# Altium PCB LimeSDR-Micro_mPCIe_1v4.PcbDoc (part 7 of 11)
Units mm, origin at the board's own origin, x right, y up, seen from the top; angles counter-clockwise.
Board outline 50.8 x 29.7 mm, 8 copper layers (Top, L2, L3, L4, L5, L6, L7, Bottom), stack 0.925 mm thick; 664 components, 386 nets, 2358 pads, 843 vias.
Unrouted connection lines stored in the file: 28.
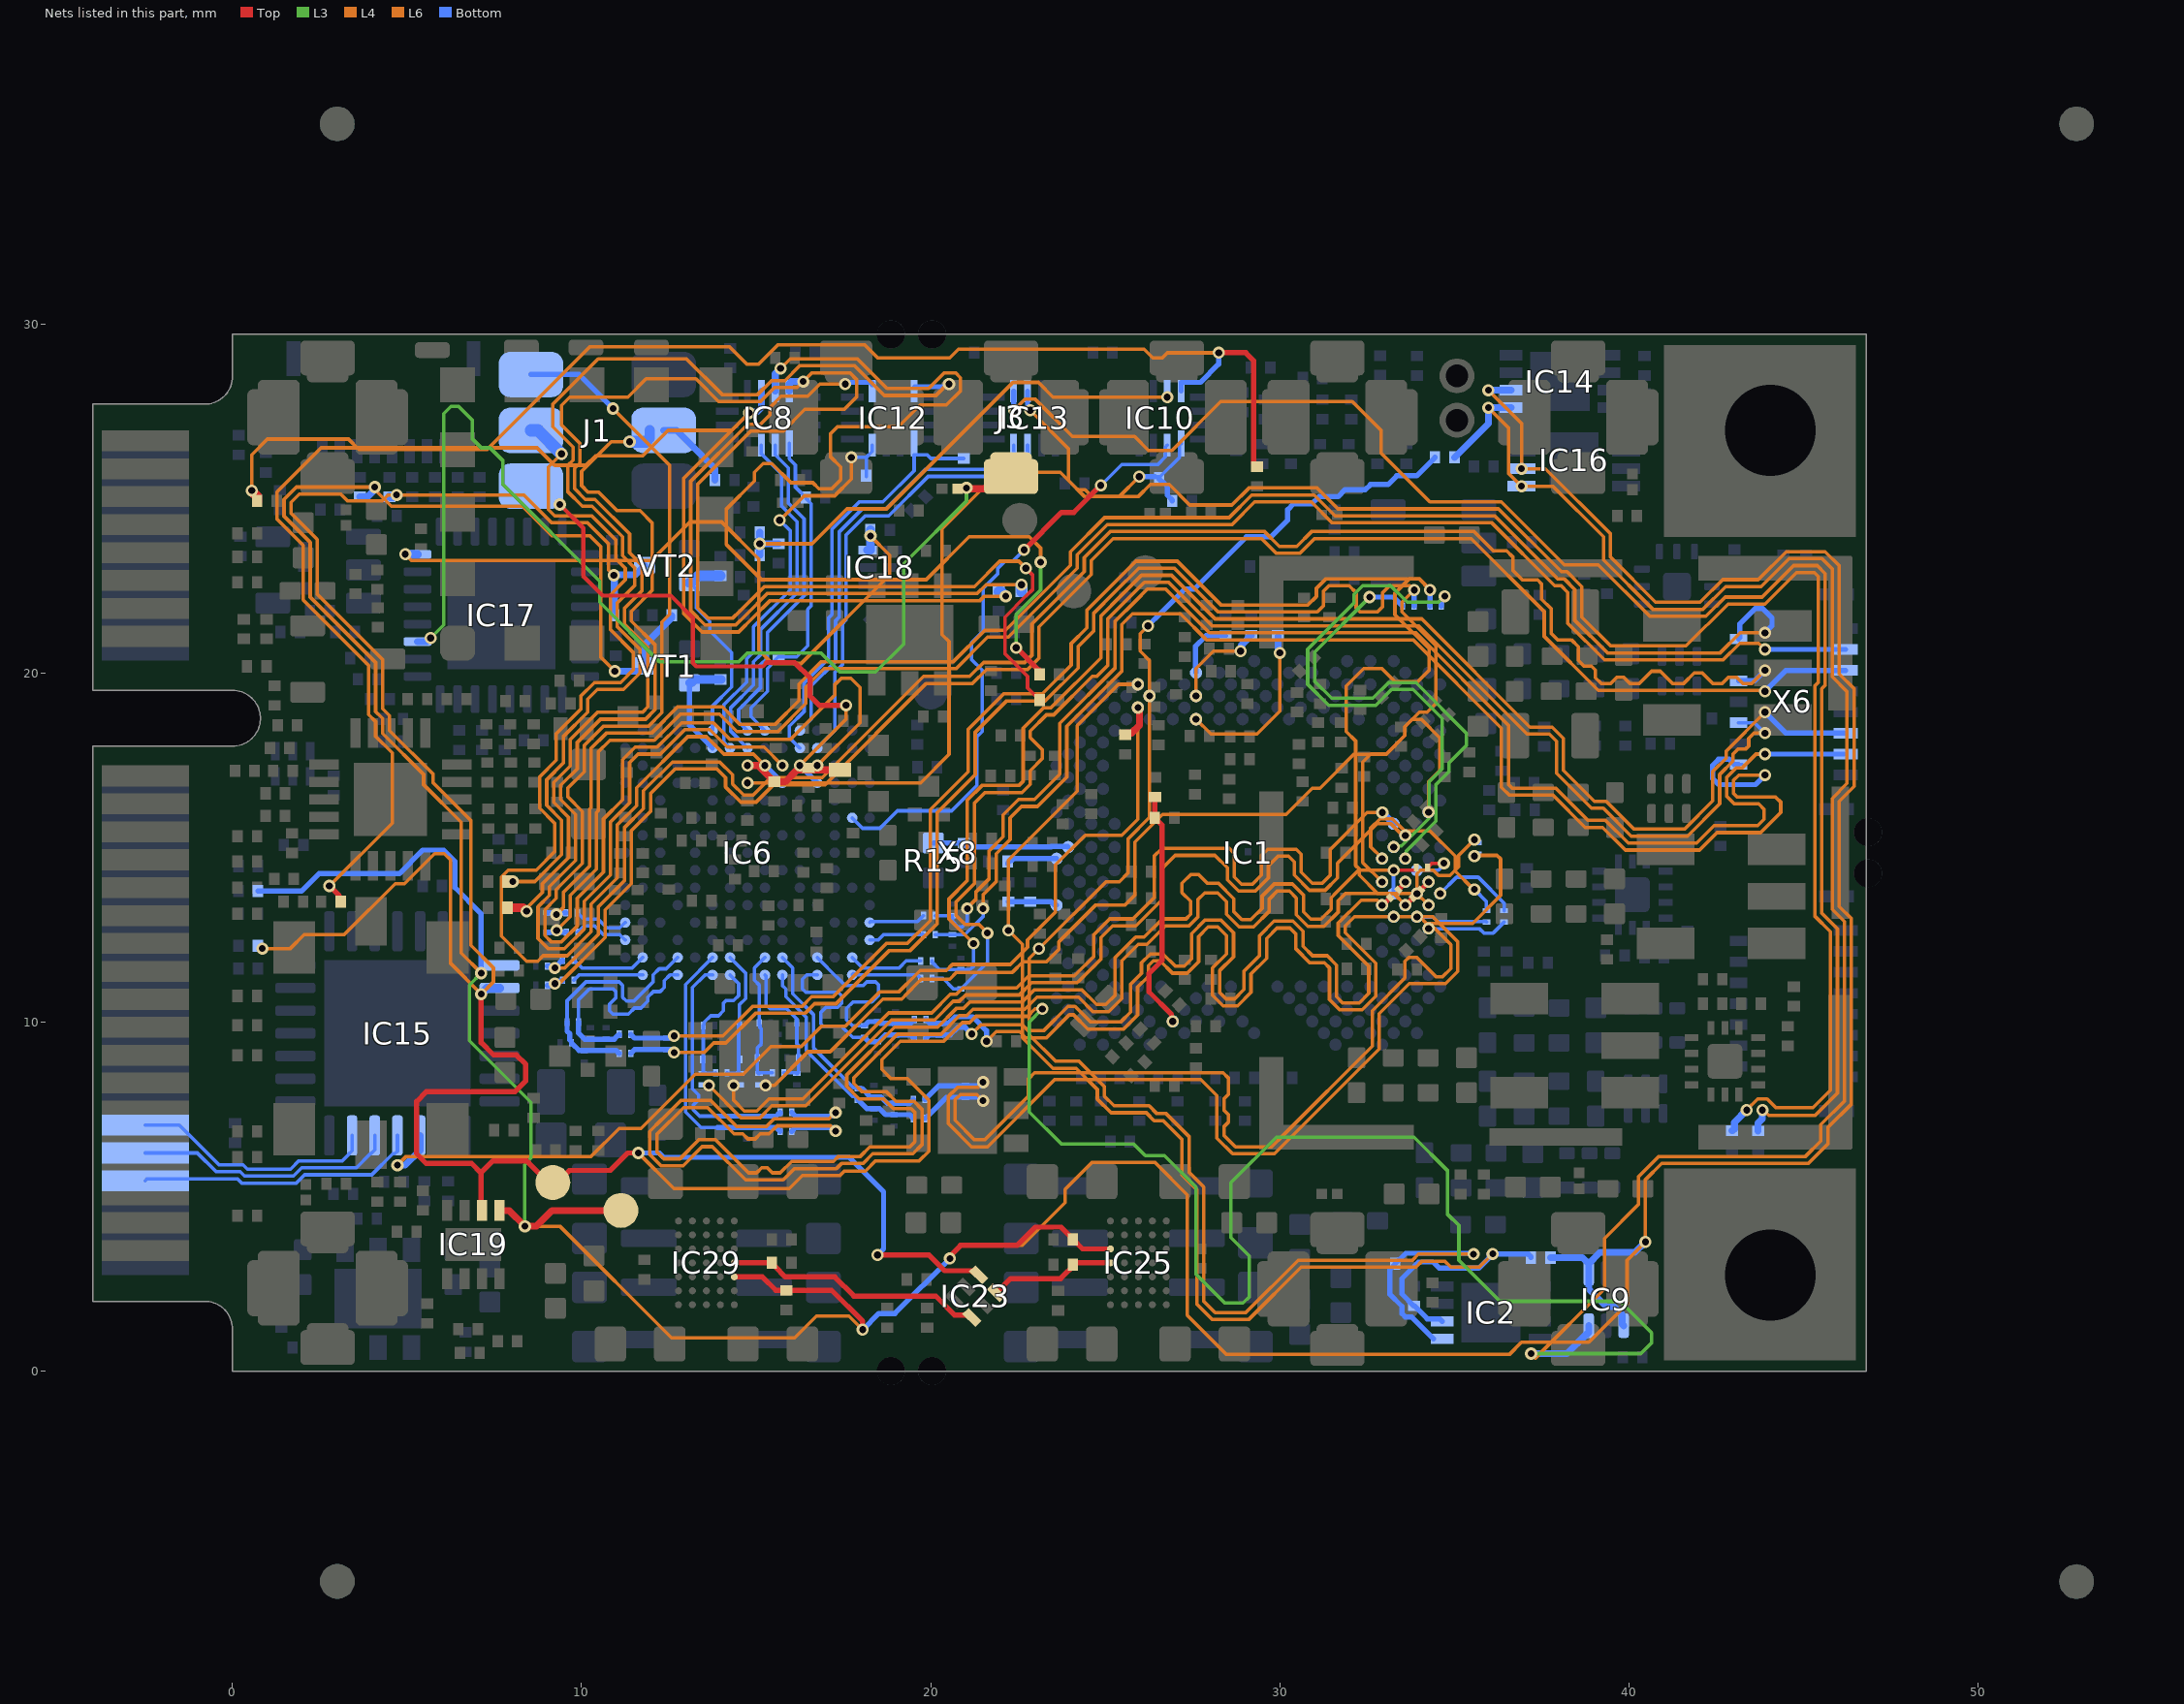
[diagram p11: the nets of this part, all layers, seen from the top]

## Via types
v1: diameter 0.35, hole 0.2, Top to Bottom, tented both sides, 684 vias
v2: diameter 0.35, hole 0.2, L5 to Bottom, tented both sides, 117 vias
v3: diameter 0.4, hole 0.2, Top to Bottom, tented both sides, 30 vias
v4: diameter 0.5, hole 0.2, Top to Bottom, tented both sides, 12 vias

## Nets (pads, with @x,y where several pads share a name; then routed paths per layer and width w, separated by ;. In a path a pad name is that pad's centre, name@x,y a point inside that pad or via, vN(x,y) a via of type N, cw(c..) or ccw(c..) an arc to the next point about the centre after c; other vN are vias at no path point) (continued)
LA_I2C_SCL: IC9.1 IC9.4 IC14.6 IC15.8 IC16.6 IC19.5 IC25.E5 IC29.E5 R26.1 R132.2 R140.2 R175.2 R197.2 R215.2 TP7.1 VT1.D | length 152
  Top w0.15: IC29.E5@14.375,2.7 15.175,2.7 15.563,2.312 R215.2@15.863,2.312 17.163,2.312 18.05,1.425 v1(18.05,1.187) ; v1(20.55,3.225) 20.55,3.295 20.855,3.6 22.475,3.6 23,4.125 23.737,4.125 23.987,3.875 24,3.875 24.075,3.8 R197.2@24.075,3.775 24.35,3.5 IC25.E5@25.15,3.5
  Top w0.2: IC19.5@7.65,4.6 7.925,4.6 v1(8.375,4.15) 8.7,4.15 9.15,4.6 TP7.1@11.125,4.6
  L3 w0.1: v1(7.125,11.4) 6.787,11.063 6.787,9.462 8.55,7.7 8.55,6.1 8.375,5.925 v1(8.375,4.15)
  L4 w0.1: v1(4.075,25.325) 1.833,25.325 1.475,24.967 1.475,24.491 2.225,23.741 2.225,22.175 4.1,20.3 4.1,18.892 4.3,18.692 4.3,18.267 5.475,17.092 5.475,16.8 6.55,15.725 6.55,11.975 v1(7.125,11.4) ; v1(20.55,3.225) 20.55,3.26 20.89,3.6 22.625,3.6 23.85,4.825 23.85,5.206 24.619,5.975 26.425,5.975 27.35,5.05 27.35,1.6 28.475,0.475 36.575,0.475 36.925,0.825 38.85,0.825 39.95,1.925 39.95,3.175 v1(40.475,3.7)
  L6 w0.1: v1@4.075,25.25 4.55,24.775 8.308,24.775 9.158,23.925 10.242,23.925 10.55,23.617 10.55,20.45 v2(10.95,20.05) ; v1(8.375,4.15) 9.375,4.15 12.575,0.95 16.1,0.95 16.725,1.575 17.662,1.575 v1(18.05,1.187) ; v1(35.975,28.1) 36.925,27.15 v2(36.925,25.85) 37.608,25.85 39.475,23.983 39.475,23.316 40.766,22.025 42.042,22.025 42.692,22.675 43.708,22.675 44.508,23.475 45.625,23.475 46.025,23.075 46.025,19.975 46.45,19.55 46.45,16.75 46.025,16.325 46.025,13.308 46.375,12.958 46.375,7.65 45.7,6.975 45.7,6.508 45.142,5.95 40.938,5.95 40.475,5.487 v1(40.475,3.7)
  Bottom w0.15: R140.2@0.73,13.75 1.975,13.75 2.475,14.25 4.775,14.25 5.45,14.925 6.05,14.925 6.375,14.6 6.375,13.85 7.125,13.1 v1(7.125,11.4) ; v1(18.05,1.187) 18.513,1.65 18.975,1.65 v1(20.55,3.225)
  Bottom w0.2: R132.2@3.65,25.045 3.87,25.045 v1@4.075,25.25 ; v2(10.95,20.05) 11.655,20.05 VT1.D@11.805,20.2 11.805,20.805 12.585,21.585 R175.2@12.585,21.65 ; v1(35.975,28.1) IC14.6@36.625,28.1 ; R26.1@37.755,3.25 38.675,3.25 IC9.1@38.85,3.075 ; IC9.4@39.85,1.3 39.81,1.34 39.81,1.615 39.575,1.85 39.35,1.85 38.85,2.35 IC9.1@38.85,2.8 IC9.1@38.85,3.075 ; v1(40.475,3.7) 40.175,3.4 39.175,3.4 IC9.1@38.85,3.075
LA_I2C_SCL_LS: IC6.P6 R176.2 VT1.S | length 3.1
  Bottom w0.15: VT1.S@13.095,19.71 13.095,18.506 IC6.P6@13.751,17.85
  Bottom w0.25: VT1.S@13.095,19.71 13.145,19.71 13.248,19.813 R176.2@13.974,19.813 R176.2@13.999,19.813
LA_I2C_SDA: IC9.6 IC14.5 IC15.9 IC16.5 IC19.6 IC23.4 R30.1 R133.2 R139.2 R186.2 TP8.1 VT2.D | length 173.2
  Top w0.15: 7.125,5.67 7.125,4.625 IC19.6@7.15,4.6 ; v1(7.125,10.8) 7.125,9.411 7.481,9.055 8.128,9.055 8.4,8.783 8.4,8.312 8.088,8 5.55,8 5.275,7.725 5.275,6.225 5.55,5.95 6.845,5.95 7.116,5.679 7.463,6.025 8.423,6.025 8.473,5.975 8.475,5.975 9.175,5.275 9.65,5.75 10.825,5.75 11.325,6.25 v1(11.625,6.25) ; v1(18.475,3.325) 19.955,3.325 20.405,2.875 IC23.4@21.24,2.875 ; IC23.4@21.203,2.855 21.204,2.857 21.275,2.857 IC23.4@21.372,2.76
  L3 w0.1: v1(23.2,10.375) 22.825,10 22.825,7.425 23.75,6.5 25.825,6.5 26.15,6.175 26.7,6.175 27.6,5.275 27.6,2.775 28.425,1.95 28.95,1.95 29.125,2.125 29.125,3.3 28.6,3.825 28.6,5.4 29.9,6.7 33.85,6.7 34.8,5.75 34.8,4.5 35.13,4.17 35.13,3.175 36.305,2 39.745,2 40.65,1.095 40.65,0.805 40.345,0.5 v1(37.2,0.5)
  L4 w0.1: v1(0.855,12.106) 1.656,12.106 2.05,12.5 3.2,12.5 4.66,13.96 4.925,13.96 5.79,14.825 6.067,14.825 6.25,14.642 6.25,11.675 v1(7.125,10.8) 7.475,11.15 7.475,11.55 6.825,12.2 6.825,15.775 5.75,16.85 5.75,17.1 4.5,18.35 4.5,18.775 4.3,18.975 4.3,20.383 2.425,22.258 2.425,23.824 1.675,24.574 1.675,24.885 1.915,25.125 3.1,25.125 3.3,24.925 4.275,24.925 4.45,25.1 v1(4.7,25.1)
  L6 w0.1: v1(4.7,25.1) 8.35,25.1 9.15,24.3 10.175,24.3 10.775,23.7 10.775,22.95 v1(10.925,22.8) ; v1(11.625,6.25) 12.65,5.225 15.95,5.225 16.328,5.603 17.4,5.603 17.525,5.728 18.128,5.728 18.425,6.025 19.675,6.025 19.95,6.3 19.95,7.76 19.335,8.375 18.865,8.375 18.6,8.64 18.6,8.917 19.133,9.45 20.375,9.45 20.909,9.984 21.117,9.984 21.297,10.164 22.778,10.164 22.99,10.375 v1(23.2,10.375) ; v1(35.975,27.6) 36.55,27.025 36.55,25.725 v2(36.925,25.35) 37.825,25.35 39.275,23.9 39.275,23.233 40.683,21.825 42.125,21.825 42.775,22.475 43.791,22.475 44.591,23.275 45.529,23.275 45.825,22.979 45.825,19.892 46.25,19.467 46.25,16.833 45.825,16.408 45.825,13.225 46.175,12.875 46.175,7.733 45.5,7.058 45.5,6.59 45.06,6.15 40.855,6.15 40.275,5.57 40.275,4.775 39.3,3.8 39.3,2.35 37.325,0.375
  Bottom w0.15: v1(11.625,6.25) 12.225,6.25 12.35,6.125 17.661,6.125 18.65,5.136 18.65,3.5 v1(18.475,3.325)
  Bottom w0.2: R186.2@10.94,21.65 10.94,22.815 11.545,22.815 VT2.D@11.805,23.075 ; R30.1@35.005,26.175 35.975,27.145 v1(35.975,27.6) IC14.5@36.625,27.6 ; v1(37.2,0.5) 38.225,0.5 38.775,1.05 38.8,1.05 38.85,1.1 IC9.6@38.85,1.3
  Bottom w0.25: R133.2@4.5,25.045 4.6,25.045 4.636,25.081 4.681,25.081 v1(4.7,25.1) ; v1(7.125,10.8) 7.3,10.975 IC15.9@7.65,10.975
LA_I2C_SDA0: IC23.3 IC25.D5 R199.2 | length 3.6
  Top w0.15: IC23.3@21.885,2.247 22.288,2.65 23.725,2.65 24.175,3.1 IC25.D5@25.15,3.1
LA_I2C_SDA1: IC23.1 IC29.D5 R214.2 | length 7.5
  Top w0.15: IC29.D5@14.375,3.1 R214.2@15.45,3.1 15.45,3.075 15.525,3 15.538,3 15.838,2.7 17.25,2.7 17.8,2.15 20.144,2.15 20.69,1.604 21.114,1.604 IC23.1@21.178,1.54
LA_I2C_SDA_LS: IC6.R6 R185.2 VT2.S | length 5.9
  Bottom w0.1: VT2.S@13.095,22.585 13.285,22.395 13.285,21.865 13.675,21.475 13.675,21.208 14.299,20.585 14.299,19.597 13.751,19.049 IC6.R6@13.751,18.35
  Bottom w0.3: VT2.S@13.095,22.585 13.145,22.585 13.348,22.788 R185.2@13.974,22.788
LA_LED1: IC13.9 R137.2 | length 47
  L6 w0.1: v1(22.4,27.525) 22.4,27.535 22.715,27.85 22.985,27.85 24.06,26.775 25.84,26.775 26.24,26.375 26.91,26.375 28.31,27.775 32.075,27.775 32.9,26.95 32.9,26.3 34.3,24.9 36.35,24.9 38.15,23.1 39.125,23.1 40.6,21.625 42.208,21.625 42.758,22.175 43.817,22.175 44.717,23.075 45.4,23.075 45.625,22.85 45.625,19.647 45.525,19.547 45.525,13.121 45.975,12.671 45.975,7.965 45.335,7.325 44.009,7.325 43.859,7.475 v1(43.825,7.475)
  Bottom w0.15: IC13.9@22.375,28.075 22.375,27.575 v1@22.425,27.525
  Bottom w0.2: R137.2@43.7,6.88 43.7,7.1 43.825,7.225 v1(43.825,7.475)
LA_LED1_LS: IC6.R11 IC13.4 | length 12.4
  Bottom w0.1: IC6.R11@16.251,18.35 16.575,18.674 16.575,19.626 17.275,20.326 17.275,21.494 17.375,21.594 17.375,24.034 18.041,24.7 18.716,24.7 19.846,25.83 21.955,25.83 22.325,26.2 22.325,26.25 22.375,26.25 IC13.4@22.375,26.525
LA_LED2: IC13.10 R142.2 | length 47.2
  L6 w0.1: v1(22.85,27.525) 23.95,26.425 23.95,25.515 24.415,25.05 25.94,25.05 26.29,25.4 26.835,25.4 27.422,24.813 28.63,24.813 29.117,25.3 31.067,25.3 31.667,24.7 36.267,24.7 38.067,22.9 38.225,22.9 38.65,22.475 38.65,21.6 39.475,20.775 41.64,20.775 42.84,21.975 43.9,21.975 44.8,22.875 45.317,22.875 45.425,22.767 45.425,19.73 45.325,19.63 45.325,18.292 45.325,13.038 45.775,12.588 45.775,8.047 45.278,7.55 44.21,7.55 43.96,7.8 43.69,7.8 43.375,7.485 v1(43.375,7.475)
  Bottom w0.15: IC13.10@22.775,28.075 22.775,27.65 v1@22.9,27.525
  Bottom w0.2: R142.2@42.95,6.885 42.975,6.885 43.025,6.935 43.025,7.125 v1(43.375,7.475)
LA_LED2_LS: IC6.P12 IC13.3 | length 12.9
  Bottom w0.1: IC6.P12@16.751,17.85 17.25,18.349 17.25,20.019 17.475,20.244 17.475,21.411 17.575,21.511 17.575,23.952 18.123,24.5 18.799,24.5 19.929,25.63 22.155,25.63 22.725,26.2 22.725,26.25 22.775,26.25 IC13.3@22.775,26.525
LA_PPS_IN: IC10.11 R167.2 R169.2 R172.2 | length 15
  L6 w0.1: v1(15.105,23.7) 16.6,23.7 17.6,24.7 18.735,24.7 22.36,28.325 23.083,28.325 23.508,27.9 v2(26.775,27.9)
  Bottom w0.2: R167.2@15.105,23.375 v1(15.105,23.7) ; R169.2@15.105,24.025 v1(15.105,23.7) ; R172.2@15.65,23.705 15.645,23.7 v1(15.105,23.7)
LA_PPS_IN_LS: IC6.K14 IC10.2 | length 17.4
  Top w0.15: v1(22.675,23.525) 23.75,24.6 24.1,24.6 v1(24.875,25.375)
  Bottom w0.1: IC6.K14@17.751,15.85 18.051,15.55 18.55,15.55 19.05,16.05 20.599,16.05 21.325,16.776 21.325,18.175 21.475,18.325 21.475,20.083 21.175,20.383 21.175,20.877 21.5,21.202 21.5,22.425 21.925,22.85 21.925,23 22.125,23.2 22.35,23.2 v1(22.675,23.525) ; v1(24.875,25.375) 25.475,25.975 26.51,25.975 26.725,26.19 26.725,26.475 IC10.2@26.775,26.525
LA_PPS_OUT: IC10.12 R181.2 R184.2 | length 37.5
  Top w0.15: v1(28.25,29.175) 29.025,29.175 29.25,28.95 29.25,26.005 R181.2@29.35,25.905
  Top w0.3: v1(0.55,25.225) 0.55,25.211 0.705,25.056 R184.2@0.705,24.925
  L6 w0.1: v1(0.55,25.225) 0.55,26.25 1,26.7 3.325,26.7 3.625,26.4 7.292,26.4 10.242,29.35 14.225,29.35 14.725,28.85 15.075,28.85 15.625,29.4 18.108,29.4 18.483,29.025 20.55,29.025 20.8,29.275 26.115,29.275 26.365,29.025 26.635,29.025 26.78,29.17 28.245,29.17 v1(28.25,29.175)
  Bottom w0.15: IC10.12@27.175,28.075 27.175,28.325 27.725,28.325 28.25,28.85 v1(28.25,29.175)
LA_PPS_OUT_LS: IC6.M8 IC10.1 R117.2 R127.1 | length 22.1
  L4 w0.1: v1(14.751,16.85) 19.71,16.85 20.525,17.665 20.525,20.9 20.325,21.1 20.325,24.125 21.95,25.75 23.715,25.75 24.215,25.25 24.425,25.25 24.625,25.05 24.85,25.05 25.4,25.05 v1(25.975,25.625)
  Bottom w0.1: R117.2@26.425,25.625 26.575,25.625 27.125,26.175 27.125,26.525 IC10.1@27.175,26.575
  Bottom w0.15: v1(25.975,25.625) R117.2@26.425,25.625 ; R117.2@26.545,25.575 26.545,25.55 26.62,25.475 26.645,25.475 26.78,25.34 26.78,25.09 26.92,24.95 R127.1@26.92,24.925
LA_RO0_EXT_I_N: R92.2 R101.1 X6.3 | length 48.4
  L6 w0.1: v2(9.284,12.625) 9.675,13.016 9.675,13.628 10.425,14.378 10.425,16.003 10.475,16.053 10.475,17.735 10.815,18.075 12.081,18.075 12.831,18.825 13.95,18.825 14.45,18.325 15.625,18.325 16.425,19.125 16.425,19.6 16.95,20.125 20.733,20.125 21.633,21.025 22.225,21.025 24.2,23 24.2,23.388 25.062,24.25 28.633,24.25 29.283,24.9 30.901,24.9 31.501,24.3 36.075,24.3 37.875,22.5 38.06,22.5 38.25,22.31 38.25,21.425 39.3,20.375 42.7,20.375 43.175,20.85 43.716,20.85 43.891,20.675 v2(43.9,20.675)
  Bottom w0.15: R101.1@9.01,12.575 R92.2@9.559,12.575 ; v2(43.9,20.675) X6.3@46.207,20.675
LA_RO0_EXT_I_P: R91.2 R100.1 X6.2 | length 48.1
  L6 w0.1: v2(9.279,13.08) 9.475,13.276 9.475,13.711 10.225,14.461 10.225,16.089 10.275,16.139 10.275,17.844 10.706,18.275 11.999,18.275 12.749,19.025 14.033,19.025 14.533,18.525 15.542,18.525 16.225,19.208 16.225,19.683 16.867,20.325 20.65,20.325 21.55,21.225 22.142,21.225 24,23.083 24,23.47 24.98,24.45 28.55,24.45 29.2,25.1 30.984,25.1 31.584,24.5 36.158,24.5 37.958,22.7 38.142,22.7 38.45,22.392 38.45,21.508 39.383,20.575 42.617,20.575 43.192,21.15 v2(43.9,21.15)
  Bottom w0.15: R100.1@9.005,13.13 R91.2@9.554,13.13 ; X6.2@43.142,20.975 43.175,21.007 43.175,21.4 43.625,21.85 43.825,21.85 44.1,21.575 44.1,21.35 v2(43.9,21.15)
LA_RO0_EXT_Q_N: R94.2 R103.1 X6.6 | length 49
  L6 w0.1: v2(9.235,11.55) 9.525,11.55 10.475,12.5 10.475,13.297 11.225,14.047 11.225,15.567 11.775,16.117 11.775,16.625 12.6,17.45 13.958,17.45 14.325,17.083 14.325,16.816 14.641,16.5 14.917,16.5 15.417,17 16.892,17 19.792,19.9 21.117,19.9 21.517,20.3 22.692,20.3 22.9,20.508 22.9,21.125 22.9,21.4 24.4,22.9 24.4,23.305 25.145,24.05 29.566,24.05 29.991,23.625 30.484,23.625 30.909,24.05 35.566,24.05 36.118,23.498 36.502,23.498 36.675,23.325 36.675,22.941 36.95,22.666 37.384,22.666 37.5,22.55 37.5,22.116 37.775,21.841 37.775,21.133 37.958,20.95 38.35,20.95 38.55,20.75 38.55,20.358 38.714,20.193 38.932,20.193 39.043,20.082 39.043,19.864 39.208,19.7 39.481,19.7 39.656,19.875 39.852,19.875 40.027,19.7 40.3,19.7 40.65,20.05 40.9,20.05 41.25,19.7 41.575,19.7 41.875,20 42.1,20 42.4,19.7 42.675,19.7 42.85,19.875 43.087,19.875 43.262,19.7 43.525,19.7 v2(43.9,20.075)
  Bottom w0.15: R103.1@9.02,11.6 9.28,11.6 9.423,11.743 9.45,11.743 R94.2@9.45,11.775 ; X6.6@43.142,19.775 43.6,19.775 v2(43.9,20.075)
LA_RO0_EXT_Q_P: R93.2 R102.1 X6.5 | length 48.8
  L6 w0.1: 9.406,11.148 10.675,12.417 10.675,13.214 11.425,13.964 11.425,15.484 11.975,16.034 11.975,16.542 12.683,17.25 13.875,17.25 14.125,17 14.125,16.775 14.125,16.733 14.558,16.3 14.6,16.3 15,16.3 15.5,16.8 16.975,16.8 19.875,19.7 21.2,19.7 21.6,20.1 22.775,20.1 23.1,20.425 23.1,21.317 24.6,22.817 24.6,23.222 25.228,23.85 29.483,23.85 29.908,23.425 30.567,23.425 30.992,23.85 35.483,23.85 37.575,21.758 37.575,21.05 39.125,19.5 43.875,19.5 v2(43.9,19.475)
  Bottom w0.15: R102.1@9.02,11.05 9.239,11.05 9.357,11.168 9.45,11.168 R93.2@9.45,11.2 ; v2(43.9,19.475) 44.5,20.075 X6.5@46.207,20.075
  other v2: 9.235,11.1
LA_RO0_I_N: IC6.C1 R92.1 | length 1.6
  Bottom w0.1: R92.1@9.889,12.575 10.064,12.75 10.375,12.75 10.625,12.5 11.092,12.5 11.242,12.35 IC6.C1@11.251,12.35
LA_RO0_I_P: IC6.D1 R91.1 | length 1.6
  Bottom w0.1: R91.1@9.884,13.13 10.064,12.95 10.475,12.95 10.725,12.7 11.092,12.7 11.242,12.85 IC6.D1@11.251,12.85
LA_RO0_Q_N: IC6.B2 R94.1 | length 2.2
  Bottom w0.1: R94.1@9.78,11.775 10.005,11.55 11.451,11.55 IC6.B2@11.751,11.85
LA_RO0_Q_P: IC6.A2 R93.1 | length 2
  Bottom w0.1: R93.1@9.78,11.2 9.93,11.35 IC6.A2@11.751,11.35
LA_RO1_EXT_I_N: R96.2 R105.1 X6.11 | length 41.8
  L6 w0.1: v2(21.225,12.25) 20.525,12.95 20.525,13.525 21.05,14.05 21.05,16.358 21.467,16.775 22.525,16.775 22.65,16.9 22.65,18.417 23.233,19 23.442,19 24.875,20.433 24.875,21.634 25.47,22.229 26.04,22.8 26.899,22.8 28.149,21.55 34.065,21.55 37.165,18.45 37.8,18.45 38.125,18.125 38.125,17.208 39.008,16.325 39.35,16.325 40.15,15.525 41.592,15.525 42.4,16.333 42.4,17.174 42.784,17.558 42.784,17.759 v2(43.9,18.875)
  Bottom w0.1: R96.2@20.04,11.75 20.04,11.718 20.257,11.5 R105.1@20.865,11.5 21.132,11.5 21.225,11.593 v2(21.225,12.25)
  Bottom w0.15: v2(43.9,18.875) 44.5,18.275 X6.11@46.207,18.275
LA_RO1_EXT_I_P: R95.2 R104.1 X6.10 | length 41
  L6 w0.1: v2(21.625,12.55) 21.375,12.8 20.975,12.8 20.725,13.05 20.725,13.442 21.25,13.967 21.25,16.275 21.55,16.575 22.619,16.575 22.85,16.806 22.85,17.2 23.2,17.55 23.2,17.8 22.85,18.15 22.85,18.334 23.316,18.8 23.525,18.8 24.625,19.9 24.759,19.9 25.075,20.216 25.075,21.551 25.67,22.146 ; 25.67,22.147 26.123,22.6 26.816,22.6 28.066,21.35 33.983,21.35 37.083,18.25 37.717,18.25 37.925,18.042 37.925,17.125 38.925,16.125 39.267,16.125 40.067,15.325 41.675,15.325 42.6,16.25 42.6,17.091 42.984,17.475 42.984,17.676 43.134,17.826 43.351,17.826 43.433,17.908 43.433,18.125 43.583,18.275 v2(43.9,18.275)
  Bottom w0.1: R95.2@20.04,11.25 20.35,11.25 20.65,10.95 R104.1@20.865,10.95 21.625,11.71 v2(21.625,12.55) ; X6.10@43.142,18.575 43.6,18.575 v2(43.9,18.275)
LA_RO1_EXT_Q_N: R98.2 R107.1 X6.14 | length 41.2
  L6 w0.1: v2(21.5,13.25) 21.5,13.65 21.875,14.025 21.875,14.825 22.275,15.225 22.275,15.85 22.6,16.175 23.058,16.175 23.9,17.017 23.9,18.475 25.475,20.05 25.475,21.386 25.784,21.695 27.155,21.695 27.9,20.95 33.817,20.95 36.35,18.417 36.35,16.725 36.575,16.5 37.825,16.5 38.75,15.575 39.251,15.575 39.901,14.925 42.025,14.925 42.525,15.425 43.775,15.425 44.35,16 44.35,16.3 44.2,16.45 43.1,16.45 43,16.55 43,16.925 43.15,17.075 v2(43.9,17.075)
  Bottom w0.1: R98.2@20.125,12.5 R107.1@20.625,12.5 20.975,12.5 21.5,13.025 v2(21.5,13.25) ; X6.14@43.142,17.375 X6.14@43.242,17.375
  Bottom w0.15: X6.14@43.142,17.375 43.025,17.375 42.875,17.525 42.57,17.525 42.4,17.355 42.4,16.975 42.575,16.8 43.625,16.8 v2(43.9,17.075)
LA_RO1_EXT_Q_P: R97.2 R106.1 X6.13 | length 40.8
  L6 w0.1: v2@21.037,13.262 21.3,13.525 21.3,13.733 21.675,14.108 21.675,14.908 22.075,15.308 22.075,15.933 22.517,16.375 22.975,16.375 23.7,17.1 23.7,18.558 25.275,20.133 25.275,21.469 25.87,22.064 ; 25.87,22.065 26.205,22.4 26.733,22.4 27.983,21.15 33.9,21.15 36.55,18.5 36.55,16.808 36.658,16.7 37.908,16.7 38.833,15.775 39.334,15.775 39.984,15.125 41.942,15.125 42.442,15.625 43.092,15.625 43.692,15.625 43.875,15.808 43.875,16.092 43.717,16.25 43.017,16.25 42.8,16.467 42.8,16.834 42.8,17.008 43.067,17.275 43.241,17.275 43.641,17.675 v2@43.9,17.675
  Bottom w0.1: R97.2@20.125,13.05 R106.1@20.625,13.05 20.625,12.884 20.784,12.725 20.9,12.725 21.05,12.875 v2(21.05,13.25)
  Bottom w0.15: v2(43.9,17.675) X6.13@46.207,17.675
LA_RO1_I_N: IC6.B14 R96.1 | length 2.2
  Bottom w0.1: IC6.B14@17.751,11.85 18.051,11.55 19.1,11.55 19.3,11.75 R96.1@19.71,11.75
LA_RO1_I_P: IC6.A14 R95.1 | length 2
  Bottom w0.1: IC6.A14@17.751,11.35 17.789,11.388 17.827,11.35 19.61,11.35 R95.1@19.71,11.25
LA_RO1_Q_N: IC6.C15 R98.1 | length 1.6
  Bottom w0.1: IC6.C15@18.251,12.35 18.5,12.35 18.65,12.5 R98.1@19.795,12.5 19.782,12.512 R98.1@19.77,12.525
LA_RO1_Q_P: IC6.D15 R97.1 | length 1.6
  Bottom w0.1: IC6.D15@18.251,12.85 18.276,12.875 19.62,12.875 R97.1@19.795,13.05
LA_RX0_I_N: C9.1 C10.1 IC6.A4 R27.1 R29.1 | length 6.8
  Bottom w0.1: C10.1@9.915,10 9.915,10.64 10.225,10.95 10.904,10.95 10.975,10.879 10.975,10.687 10.8,10.512 10.8,10.325 10.9,10.225 11.34,10.225 11.515,10.4 11.7,10.4 11.9,10.6 11.9,10.716 12.057,10.873 12.248,10.873 12.367,10.992 12.367,11.183 12.53,11.346 12.747,11.346 IC6.A4@12.751,11.35
  Bottom w0.15: C10.1@9.915,10 9.915,9.68 10.085,9.51 R29.1@10.25,9.51 10.935,9.51 11.043,9.618 11.075,9.618 R27.1@11.075,9.65
LA_RX0_I_P: C10.2 C11.2 IC6.B4 R32.2 R33.1 | length 7.2
  Bottom w0.1: C10.2@9.585,10 9.585,10.61 10.125,11.15 11.075,11.15 11.175,11.05 11.175,10.708 11.283,10.6 11.501,10.6 12.051,11.15 12.051,11.351 12.225,11.525 12.426,11.525 IC6.B4@12.751,11.85
  Bottom w0.15: C10.2@9.585,10 9.585,9.74 9.665,9.66 9.665,9.482 9.71,9.437 C11.2@9.71,9.405 9.71,9.372 9.742,9.372 9.925,9.19 R32.2@10.075,9.19 10.985,9.19 R33.1@11.075,9.1
LA_RX0_Q_N: C14.1 C15.1 IC6.B6 R36.1 R38.1 | length 7.7
  Bottom w0.1: IC6.B6@13.751,11.85 12.975,11.074 12.975,7.425 13.425,6.975 13.9,6.975
  Bottom w0.15: 13.9,6.975 C14.1@14.725,6.975 R38.1@15.25,6.975 15.575,6.975 15.652,6.897 15.685,6.897 R36.1@15.685,6.865
LA_RX0_Q_P: C15.2 C16.2 IC6.A6 R40.2 R41.1 | length 7
  Bottom w0.1: IC6.A6@13.751,11.35 13.747,11.346 13.53,11.346 13.175,10.991 13.175,8.085 13.35,7.91 13.35,7.775 13.2,7.625 13.2,7.483 13.378,7.305 13.9,7.305
  Bottom w0.15: 13.9,7.305 C15.2@14.15,7.305 C16.2@14.725,7.305 R40.2@15.275,7.305 15.575,7.305 15.652,7.382 15.685,7.382 R41.1@15.685,7.415
LA_RX1_I_N: C19.1 C20.1 IC6.B10 R43.1 R45.1 | length 6.5
  Bottom w0.1: IC6.B10@15.751,11.85 16.05,11.551 16.05,11.475 16.051,11.474 16.051,11.226 16.05,11.225 16.05,10.808 16.64,10.218 16.64,9.263 17.788,8.115 17.9,8.115 C20.1@17.925,8.09
  Bottom w0.15: C20.1@17.925,8.09 18.035,8.09 18.275,7.85 R45.1@18.375,7.85 18.575,7.85 18.75,7.675 C19.1@18.95,7.675 19.4,7.675 19.477,7.752 19.51,7.752 R43.1@19.51,7.785
LA_RX1_I_P: C20.2 C21.2 IC6.A10 R47.2 R48.1 | length 6.3
  Bottom w0.1: IC6.A10@15.751,11.35 15.751,11.049 15.85,10.95 15.85,10.725 16.44,10.135 16.44,9.18 17.755,7.865 17.82,7.865 C20.2@17.925,7.76
  Bottom w0.15: C20.2@17.925,7.76 18.165,7.52 R47.2@18.375,7.52 18.53,7.52 18.705,7.345 C21.2@18.95,7.345 19.4,7.345 19.477,7.267 19.51,7.267 R48.1@19.51,7.235
LA_RX1_Q_N: C24.1 C25.1 IC6.A12 R50.1 R52.1 | length 6.3
  Bottom w0.1: IC6.A12@16.751,11.35 16.45,11.35 16.325,11.225 16.325,10.95 16.425,10.85 17.35,10.85 17.45,10.75 17.45,10.533 17.339,10.421 16.996,10.421 16.85,10.275 16.85,9.95 16.925,9.875 17.45,9.875 17.765,9.56 C25.1@18.1,9.56
  Bottom w0.15: C25.1@18.1,9.56 18.22,9.44 R52.1@18.475,9.44 18.507,9.44 18.703,9.635 C24.1@18.988,9.635 19.425,9.635 19.503,9.557 19.535,9.557 R50.1@19.535,9.525
LA_RX1_Q_P: C25.2 C26.2 IC6.B12 R56.2 R57.1 | length 6
  Bottom w0.1: IC6.B12@16.751,11.85 17.051,11.55 ; 17.051,11.549 17.55,11.05 18.075,11.05 18.175,11.15 18.425,11.15 18.5,11.075 18.5,10.76 18.315,10.575 17.775,10.575 17.592,10.392 17.592,10.058 17.76,9.89 C25.2@18.1,9.89
  Bottom w0.15: C25.2@18.133,9.922 18.22,10.01 R56.2@18.475,10.01 18.507,10.01 18.553,9.965 C26.2@18.988,9.965 19.425,9.965 19.503,10.042 19.535,10.042 R57.1@19.535,10.075
LA_SPI_ADF_SS: IC12.12 R183.2 | length 32.3
  Top w0.2: R183.2@7.875,14.03 R183.2@7.88,14.025
  L6 w0.1: v1@8.03,14.025 8.658,14.025 9.425,14.792 9.425,15.783 9,16.208 9,16.942 9.475,17.417 9.475,18.175 10.175,18.875 10.175,19.25 10.45,19.525 11.2,19.525 11.675,20 11.675,20.675 11.025,21.325 11.025,22.008 11.525,22.508 11.525,23.008 11.175,23.358 11.175,23.9 10.3,24.775 10.025,24.775 9.6,25.2 9.6,25.941 9.755,26.095 9.755,26.47 9.175,27.05 9.175,27.7 10.475,29 13,29 14.025,27.975 15.042,27.975 15.442,28.375 15.825,28.375 16.25,28.8 17.817,28.8 18.667,27.95 20.15,27.95 v2@20.525,28.325
  Bottom w0.15: IC12.12@19.55,28.2 20.45,28.2 v2(20.525,28.275)
  other v1: 8.03,14.025
LA_SPI_ADF_SS_LS: IC6.P11 IC12.1 R110.2 | length 11.9
  Bottom w0.1: IC6.P11@16.251,17.85 15.951,18.15 15.951,18.474 16.375,18.898 16.375,19.709 17.075,20.409 17.075,21.576 17.175,21.676 17.175,24.117 17.958,24.9 18.633,24.9 19.525,25.792 19.525,26.25 19.9,26.25 20.005,26.145 R110.2@20.95,26.145
LA_SPI_LMS_SS: IC12.9 R23.2 | length 20.6
  L6 w0.1: v2(17.55,28.275) 16.825,28.275 16.475,27.925 15.715,27.925 15.4,27.61 15.4,27.4 15.125,27.125 14.758,27.125 13.125,25.492 13.125,21.783 13.533,21.375 14.417,21.375 14.725,21.683 15.317,22.275 21.333,22.275 21.588,22.53 v1(22.6,22.53)
  Bottom w0.15: v2(17.55,28.275) 17.6,28.325 18.3,28.325 18.325,28.3 IC12.9@18.325,28.262
  Bottom w0.3: R23.2@22.6,22.33 v1(22.6,22.53)
LA_SPI_LMS_SS_LS: IC6.P7 IC12.4 R111.2 | length 12.1
  L6 w0.1: v1(15.675,24.375) 15.675,24.365 16.385,25.075 17.247,25.075 17.725,25.553 v2(17.725,26.175)
  Bottom w0.1: IC6.P7@14.251,17.85 14.075,18.026 14.075,19.091 14.725,19.741 14.725,20.4 14.925,20.6 14.925,21.325 15.975,22.375 15.975,24.075 v1(15.675,24.375) ; v2(17.725,26.175) 18.15,26.175 ; R111.2@18.155,25.625 18.155,26.17 18.15,26.175 ; IC12.4@18.325,26.525 18.325,26.35 18.15,26.175
LA_SPI_MISO: IC8.11 R22.2 | length 32.2
  Top w0.15: v1(22.45,20.725) R22.2@23.095,20.08 ; R22.2@23.12,19.957 R22.2@23.12,20.08
  L3 w0.1: v1(22.45,20.725) 22.45,21.675 23.15,22.375 v1(23.15,23.175)
  L6 w0.1: v2(15.7,28.725) 15.975,29 17.9,29 18.75,28.15 19.94,28.15 20.39,28.6 20.71,28.6 20.85,28.46 20.85,28.075 20.45,27.675 19.7,27.675 19.075,27.05 17.333,27.05 17.125,26.842 17.125,26.2 17.425,25.9 17.425,25.535 17.165,25.275 16.8,25.275 16.625,25.45 16,25.45 15.45,26 15.2,26 14.95,25.75 14.95,25.5 14.15,24.7 14.15,23.675 15.15,22.675 19.875,22.675 21.1,23.9 22.825,23.9 23.15,23.575 v1(23.15,23.175)
  Bottom w0.2: IC8.11@15.55,28.075 15.55,28.575 v2(15.7,28.725)
LA_SPI_MISO_LS: IC6.R8 IC8.2 | length 9.4
  Bottom w0.1: IC6.R8@14.751,18.35 14.5,18.601 14.5,18.95 15.125,19.575 15.125,20.234 15.325,20.434 15.325,21.16 16.375,22.21 16.375,24.417 15.925,24.867 15.925,25.875 15.55,26.25 IC8.2@15.55,26.525
LA_SPI_MOSI: IC8.12 R21.2 R182.2 | length 54
  Top w0.1: v1(22.725,23) 22.925,22.8 22.925,22.395 22.735,22.205 22.73,22.205 22.125,21.6 22.125,20.55 22.775,19.9 22.775,19.57 22.995,19.35 23.02,19.35 23.12,19.25 R21.2@23.12,19.225
  Top w0.25: R182.2@7.88,13.275 8.325,13.275 v1(8.425,13.175)
  L6 w0.1: v1(8.425,13.175) 8.425,13.258 8.875,13.708 8.875,13.959 9.625,14.709 9.625,15.866 9.2,16.291 9.2,16.859 9.675,17.334 9.675,18.092 10.458,18.875 11.75,18.875 11.9,19.025 11.9,20.733 11.225,21.408 11.225,21.85 11.725,22.35 11.725,23.09 11.375,23.44 11.375,23.983 10.383,24.975 10.108,24.975 9.8,25.283 9.8,25.858 9.955,26.012 9.955,26.575 9.425,27.105 9.425,27.667 9.658,27.9 11.325,27.9 11.85,28.425 13.275,28.425 13.925,27.775 15.125,27.775 15.525,28.175 16.175,28.175 v2(16.35,28.35) 16.6,28.6 17.685,28.6 17.875,28.41 17.875,27.9 17.525,27.55 16.392,27.55 15.767,26.925 14.841,26.925 13.325,25.409 13.325,21.865 13.615,21.575 14.335,21.575 14.525,21.765 15.234,22.475 21.25,22.475 21.975,23.2 22.525,23.2 v1(22.725,23)
  Bottom w0.2: IC8.12@15.95,28.075 15.95,28.3 16,28.35 v2(16.35,28.35)
LA_SPI_MOSI_LS: IC6.R9 IC8.1 R118.2 R128.1 | length 9.8
  Bottom w0.1: IC6.R9@15.251,18.35 14.85,18.751 14.85,19 15.325,19.475 15.325,20.13 15.525,20.33 15.525,20.351 15.629,20.455 R128.1@15.65,20.455 16.155,20.455 16.475,20.775 16.475,21.825 16.575,21.925 16.575,24.845 R118.2@16.475,24.945 ; IC8.1@15.95,26.575 15.95,26.133 16.125,25.958 16.125,25.325 16.475,24.975 R118.2@16.475,24.945 ; R118.2@16.42,25.025 16.42,25 R118.2@16.475,24.945
LA_SPI_SCLK: IC8.10 R20.2 R180.2 | length 46.4
  Top w0.15: v1(2.775,13.9) 3.058,13.617 3.058,13.492 R180.2@3.1,13.45
  L4 w0.1: v1(2.775,13.9) 4.575,15.7 4.575,17.709 4.1,18.184 4.1,18.608 3.9,18.808 3.9,20.217 2.025,22.092 2.025,23.658 1.275,24.408 1.275,25.184 2.541,26.45 8.725,26.45 9.225,25.95 10.117,25.95 10.392,26.225 11.751,26.225 12.476,26.95 14.3,26.95 v1(14.8,27.45)
  L6 w0.1: v1(14.8,27.45) 12.925,25.575 12.925,21.7 13.45,21.175 14.5,21.175 14.925,21.6 15.4,22.075 21.416,22.075 21.541,22.2 v1(22.15,22.2)
  Bottom w0.2: v1(14.8,27.45) 14.829,27.479 15.029,27.479 15.15,27.6 IC8.10@15.15,28.075
  Bottom w0.3: R20.2@21.95,22.33 22.02,22.33 v1(22.15,22.2)
LA_SPI_SCLK_LS: IC6.P8 IC8.3 | length 10.1
  Bottom w0.1: IC6.P8@14.751,17.85 14.275,18.326 14.275,19.008 14.925,19.658 14.925,20.317 15.125,20.517 15.125,21.242 16.175,22.292 16.175,24.335 15.725,24.785 15.725,25.7 15.15,26.275 IC8.3@15.15,26.525
LA_TCK: IC6.N10 J1.5 R89.2 | length 34.8
  L6 w0.1: v2(11.375,26.625) 10.85,26.625 10,25.775 10,25.365 10.19,25.175 10.49,25.175 11.015,24.65 11.675,24.65 12.025,24.3 12.025,22.367 11.425,21.767 11.425,21.49 12.1,20.815 12.1,18.942 11.833,18.675 10.541,18.675 9.875,18.009 9.875,17.251 9.4,16.776 9.4,16.374 9.825,15.949 9.825,14.626 9.075,13.876 9.075,13.625 8.75,13.3 8.75,12.392 9.042,12.1 9.509,12.1 10.075,12.666 10.075,13.462 10.825,14.212 10.825,15.732 11.375,16.282 11.375,17.434 11.616,17.675 12.259,17.675 12.959,18.375 13.675,18.375 14.175,17.875 15.226,17.875 v2(15.751,17.35)
  Bottom w0.2: J1.5@12.35,26.95 12.725,26.95 13.82,25.855 R89.2@13.82,25.525
  Bottom w0.3: J1.5@11.85,26.625 11.953,26.728 J1.5@11.953,26.95
  Bottom w0.35: v2(11.375,26.625) J1.5@11.85,26.625
LA_TDI: IC6.M10 J1.2 | length 33.1
  L6 w0.1: v1(9.425,26.275) 9.05,25.9 9.05,24.683 9.233,24.5 10.292,24.5 10.975,23.817 10.975,23.275 11.25,23 11.25,22.665 10.825,22.24 10.825,21.242 11.475,20.592 11.475,20.083 11.117,19.725 10.367,19.725 9.975,19.333 9.975,18.958 9.275,18.258 9.275,17.5 8.8,17.025 8.8,16.125 9.225,15.7 9.225,14.875 8.7,14.35 7.895,14.35 7.705,14.16 7.705,12.46 8.424,11.741 8.741,11.741 8.9,11.9 9.592,11.9 10.275,12.583 10.275,13.379 11.025,14.129 11.025,15.649 11.575,16.199 11.575,16.708 13.042,18.175 13.575,18.175 14.075,17.675 14.926,17.675 v2(15.251,17.35)
  Bottom w0.15: v2(15.251,17.35) IC6.M10@15.751,16.85
  Bottom w0.35: J1.2@8.55,26.95 8.75,26.95 v1(9.425,26.275)
LA_TDO: IC6.N12 J1.1 | length 38.8
  L6 w0.1: v1(10.9,27.575) 12.525,25.95 12.525,21.683 12.3,21.458 12.3,18.859 11.916,18.475 10.624,18.475 10.075,17.926 10.075,17.169 9.6,16.694 9.6,16.456 10.025,16.031 10.025,14.544 9.275,13.794 9.275,13.542 8.95,13.217 8.95,12.475 9.125,12.3 9.426,12.3 9.875,12.749 9.875,13.545 10.625,14.295 10.625,15.815 11.175,16.365 11.175,17.517 11.533,17.875 11.85,17.875 12.164,17.875 12.864,18.575 13.775,18.575 14.25,18.1 15.986,18.1 17.25,19.364 17.25,19.66 17.44,19.85 17.71,19.85 17.975,19.585 17.975,18.574 v2(16.751,17.35)
  Bottom w0.15: J1.1@8.55,28.55 9.925,28.55 v1(10.9,27.575)
LA_TMS: IC6.M12 J1.3 | length 15.6
  Top w0.12: v1(9.375,24.825) 10.05,24.15 10.05,22.768 10.603,22.215 12.553,22.215 13.19,21.578 13.19,20.284 13.284,20.19 15.19,20.19 15.3,20.3
  Top w0.15: 15.3,20.3 16.102,20.3 16.551,19.852 16.551,19.33 16.806,19.075 v1(17.575,19.075) ; v1@17.502,19.025 17.513,19.037 v1@17.525,19.025
  L6 w0.1: v2(16.251,17.35) 17.575,18.674 v1(17.575,19.075)
  Bottom w0.15: v2(16.251,17.35) IC6.M12@16.751,16.85
LA_TRST: C113.1 D2.C IC6.N8 R74.2 | length 3
  Top w0.2: v1(14.751,17.35) 15.055,17.35 15.45,16.955 15.45,16.93 15.5,16.88 R74.2@15.525,16.88 15.83,16.88 16.175,17.225 D2.C@17.401,17.225
LA_TX_I_N: C2.1 C3.1 IC6.B7 R4.1 R5.2 | length 4
  Bottom w0.1: C2.1@14.165,8.55 14.19,8.525 R5.2@14.525,8.525 ; IC6.B7@14.251,11.85 14.7,11.401 14.7,10.675 14.515,10.49 R4.1@14.515,9.9 14.5,9.885 14.5,8.55 R5.2@14.525,8.525 ; R5.2@14.54,8.525 R5.2@14.525,8.525
LA_TX_I_P: C1.2 C2.2 IC6.A7 R1.2 R2.1 | length 4
  Bottom w0.1: C2.2@13.835,8.55 13.81,8.525 R1.2@13.46,8.525 13.485,8.55 R2.1@13.485,9.9 13.51,9.925 13.51,9.99 13.698,10.177 13.919,10.177 14.065,10.322 14.065,10.54 14.138,10.613 14.355,10.613 14.5,10.758 14.5,11.101 IC6.A7@14.251,11.35
LA_TX_Q_N: C5.1 C6.1 IC6.B9 R18.1 R19.2 | length 4
  Bottom w0.1: IC6.B9@15.251,11.85 14.951,11.55 14.951,11.199 15.085,11.065 R18.1@15.085,9.975 15.085,9.925 15.11,9.9 15.11,9.835 15.15,9.795 15.15,9.375 15.035,9.26 C6.1@15.035,8.975 15.035,8.55 15.06,8.525 R19.2@15.085,8.525 15.11,8.55 C5.1@15.46,8.55
LA_TX_Q_P: C4.2 C5.2 IC6.A9 R14.2 R16.1 | length 3.9
  Bottom w0.1: IC6.A9@15.251,11.35 15.285,11.316 15.285,10.49 15.4,10.375 15.875,10.375 16.165,10.085 R16.1@16.165,9.975 16.165,9.385 16.215,9.335 C4.2@16.215,8.975 16.215,8.55 16.19,8.525 R14.2@16.165,8.525 16.14,8.55 C5.2@15.79,8.55
LED_WLAN#: IC15.19 X8.44 | length 7.6
  Bottom w0.1: X8.44@-2.5,6.25 -1.008,6.25 -0.469,5.711 0.217,5.711 0.342,5.586 1.746,5.586 1.984,5.825 3.55,5.825 3.95,6.225 3.961,6.225 4.075,6.339 IC15.19@4.075,6.75
LED_WPAN#: IC15.18 X8.46 | length 8.1
  Bottom w0.1: X8.46@-2.5,5.45 -2.438,5.511 0.135,5.511 0.26,5.386 1.828,5.386 2.067,5.625 3.99,5.625 4.59,6.225 4.65,6.225 4.725,6.3 IC15.18@4.725,6.75
LED_WWAN#: IC15.20 X8.42 | length 7.1
  Bottom w0.1: X8.42@-2.5,7.05 -1.525,7.05 -0.386,5.911 0.3,5.911 0.425,5.786 1.663,5.786 1.901,6.025 3.15,6.025 3.325,6.2 3.325,6.211 3.425,6.311 IC15.20@3.425,6.75
LMK_CLKOUT1: ESD6.1 IC17.3 J3.1 | length 31.9
  Top w0.2: ESD6.1@20.775,25.275 21.85,25.275 J3.1@22.3,25.725
  L3 w0.1: v1(5.675,21) 6.05,21.375 6.05,27.425 6.259,27.634 6.476,27.634 6.875,27.235 6.875,26.7 7.125,26.45 7.375,26.45 7.75,26.075 7.75,25.4 10.525,22.625 10.525,22.025 12.225,20.325 14.51,20.325 14.76,20.575 16.85,20.575 17.4,20.025 18.425,20.025 19.225,20.825 19.225,23.125 21.025,24.925 v1(21.025,25.3)
  Bottom w0.2: IC17.3@5.3,20.9 5.575,20.9 v1(5.675,21)
LMK_CLKOUT4: IC17.8 IC18.3 R154.1 | length 21
  L4 w0.1: v1(4.95,23.4) 5.125,23.225 12,23.225 13.1,24.325 14.014,24.325 15.075,23.264 15.075,20.655 15.458,20.273 16.292,20.273 18.825,22.805 18.825,23.375 v1(18.275,23.925)
  Bottom w0.25: v1(4.95,23.4) IC17.8@5.3,23.4 ; IC18.3@18.187,23.525 18.27,23.525 R154.1@18.27,24.1
LMS_ADCIN_I1_N: IC1.U5 R34.2 | length 15.4
  L3 w0.1: v1(33.263,15.012) 33.297,15.046 33.488,15.046 34.275,15.833 34.275,16.883 34.65,17.258 34.65,18.692 33.817,19.525 33.2,19.525 32.75,19.075 31.4,19.075 30.8,19.675 30.8,20.683 32.125,22.008 32.125,22.25 32.375,22.5 33.175,22.5 33.65,22.025 34.55,22.025 v1(34.725,22.2)
  Bottom w0.15: R34.2@34.63,21.916 34.63,22.051 34.725,22.146 v1(34.725,22.2)
LMS_ADCIN_I1_P: IC1.V4 R28.2 | length 13.8
  L3 w0.1: v1(32.575,22.175) 31,20.6 31,19.758 31.483,19.275 32.667,19.275 33.117,19.725 33.9,19.725 35.35,18.275 35.35,17.925 34.85,17.425 34.85,17.175 34.475,16.8 34.475,15.75 33.63,14.905 33.63,14.713 v1(33.596,14.679)
  Bottom w0.15: v1(32.575,22.175) 33.261,22.175 R28.2@33.52,21.916
LMS_ADCIN_I2_N: IC1.V6 R49.2 | length 5.9
  L4 w0.1: v1@32.938,14.687 v1(32.93,14.679) 32.93,14.695 32.605,15.02 32.605,15.555 32.875,15.825 33.225,15.825 33.575,15.475 34.3,15.475 35.025,14.75 35.025,14.325 35.55,13.8 v1(35.575,13.8)
  Bottom w0.1: v1(35.575,13.8) 35.919,13.456 35.919,13.196 R49.2@35.925,13.19
LMS_ADCIN_I2_P: IC1.AA1 R44.2 | length 2.6
  Bottom w0.1: v1(34.595,13.68) 35.064,14.15 35.685,14.15 36.425,13.41 R44.2@36.425,13.19
LMS_ADCIN_Q1_N: IC1.W3 R42.2 | length 1.3
  Top w0.1: R42.2@34.24,14.425 34.365,14.55 v1(34.7,14.55)
  Bottom w0.1: IC1.W3@33.937,14.354 IC1.W3@33.929,14.346 34.546,14.346 v1@34.65,14.45
LMS_ADCIN_Q1_P: IC1.Y2 R37.2 | length 0.4
  Top w0.15: R37.2@34.042,13.792 v1(34.262,14.013)
  Bottom w0.1: v1(34.262,14.013) ccw(c34.262,14.116) IC1.Y2@34.334,14.043
LMS_ADCIN_Q2_N: IC1.Y4 R58.2 | length 0.3
  Top w0.15: R58.2@33.392,13.792 v1@33.583,13.983 ; v1@33.583,13.983 ccw(c33.553,14.013) v1(33.596,14.013)
LMS_ADCIN_Q2_P: IC1.AA3 R51.2 | length 3.1
  L6 w0.1: v2(33.929,13.68) 33.929,14.254 34.029,14.354 34.396,14.354 34.55,14.2 34.875,14.2 35.125,14.45 35.125,14.775 v1(35.575,15.225)
  Bottom w0.15: v1(35.575,15.225) 35.575,15.207 35.642,15.14 R51.2@35.675,15.14
LMS_CORE_LDO_EN: IC1.U33 R13.1 R15.2 | length 3.9
  Bottom w0.15: R15.2@20.075,15.125 20.945,15.125 R13.1@20.95,15.12 21.058,15.012 23.443,15.012 23.46,15.029 23.921,15.029 IC1.U33@23.938,15.012
LMS_I2C_SCL: IC1.C27 IC2.6 R26.2 R54.1 | length 38.7
  L4 w0.1: v1(22.225,12.625) 22.625,12.225 22.625,9.55 23.5,8.675 24.167,8.675 24.775,8.067 24.775,7.792 25.167,7.4 26.175,7.4 26.4,7.175 26.662,7.175 27.2,6.637 27.2,5.617 27.625,5.192 27.625,1.917 28.067,1.475 29.108,1.475 30.608,2.975 33.9,2.975 34.075,3.15 34.725,3.15 34.9,2.975 35.717,2.975 v1(36.1,3.358)
  L6 w0.1: v1(22.225,12.625) 22.225,14.641 24.2,16.616 24.2,18.492 25.382,19.674 v2(25.936,19.674)
  Bottom w0.15: R54.1@33.844,1.864 33.5,2.208 33.5,2.652 33.973,3.125 34.395,3.125 34.57,2.95 35.7,2.95 36,3.25 36,3.358 36.008,3.35 37.12,3.35 37.195,3.275 R26.2@37.195,3.25 ; R54.1@33.85,1.87 34.226,1.494 34.581,1.494 IC2.6@34.65,1.425
LMS_I2C_SDA: IC1.D26 IC2.5 R30.2 R53.1 | length 48.5
  L4 w0.1: v1(23.1,12.1) 22.825,11.825 22.825,9.633 23.583,8.875 24.25,8.875 24.975,8.15 24.975,7.875 25.25,7.6 26.258,7.6 26.483,7.375 26.745,7.375 27.4,6.72 27.4,5.7 27.825,5.275 27.825,2 28.15,1.675 29.025,1.675 30.525,3.175 33.8,3.175 33.975,3.35 v1(35.55,3.35)
  L6 w0.1: v1(23.1,12.1) 25.021,14.021 25.405,14.021 25.65,14.266 25.65,15.241 26.269,15.86 v2(26.269,19.341) 26.269,20.356 26,20.625 26,21.125 v2(26.225,21.35)
  Bottom w0.15: v2(26.225,21.35) 26.6,21.725 27.275,22.4 27.543,22.4 29.043,23.9 29.745,23.9 30.225,24.38 30.225,24.675 30.4,24.85 30.93,24.85 31.13,25.05 31.668,25.05 31.868,25.25 32.45,25.25 32.6,25.4 33.1,25.4 33.35,25.65 33.92,25.65 R30.2@34.445,26.175 ; R53.1@33.305,3.075 R53.1@33.305,3.069 ; IC2.5@34.4,0.925 33.78,1.545 33.603,1.545 33.5,1.648 33.5,1.854 33.15,2.204 33.15,2.908 33.305,3.063 R53.1@33.305,3.069 ; v1@35.525,3.375 33.611,3.375 R53.1@33.305,3.069
LMS_MCLK1: IC1.AB34 R7.1 R84.1 | length 1.4
  Bottom w0.15: R84.1@22.225,13.445 22.875,13.445 23.453,13.445 23.551,13.347 IC1.AB34@23.605,13.347
LMS_RESET: IC1.E27 IC15.17 R10.1 | length 31.7
  Top w0.2: R10.1@25.575,18.23 25.625,18.28 25.755,18.28 25.978,18.503 25.978,18.86 25.965,18.873 25.965,18.979 v1(25.936,19.008)
  L6 w0.1: v1(4.725,5.9) 4.975,6.15 10.275,6.15 11.075,6.95 11.7,6.95 13.258,8.508 14.633,8.508 15.425,9.3 16.29,9.3 16.865,9.875 17.135,9.875 17.55,9.875 18.525,10.85 18.539,10.85 18.549,10.86 19.085,10.86 19.125,10.9 19.55,11.325 19.7,11.475 20.45,11.475 20.625,11.65 22.285,11.65 22.775,12.14 22.775,12.35 23.575,13.15 23.575,14.5 24.428,15.353 25.478,15.353 25.936,15.811 v1(25.936,19.008)
  Bottom w0.2: v1(4.725,5.9) 4.95,5.9 5.375,6.325 IC15.17@5.375,6.75
LMS_RX1_BB_I_N: IC1.AB2 R27.2 R31.1 R34.1 | length 48.1
  L4 w0.1: v1(34.262,13.347) 33.921,13.688 32.795,13.688 32.275,14.208 32.275,14.385 32.175,14.485 32.175,18.05 31.9,18.325 31.9,19.625 32.4,20.125 32.925,20.125 33.3,19.75 33.95,19.75 34.275,20.075 34.275,20.692 33.3,21.667 33.3,22.285 33.715,22.7 33.985,22.7 34.3,22.385 v1(34.3,22.375)
  L6 w0.1: v2(12.65,9.6) 14.05,9.6 14.9,10.45 16.317,10.45 16.592,10.725 17.208,10.725 18.733,12.25 19.333,12.25 19.99,12.907 19.99,16.082 21.075,17.167 21.075,18.383 22.092,19.4 23.2,19.4 24.025,20.225 24.025,20.825 24.025,20.842 24.475,21.292 24.475,21.8 25.07,22.395 ; 25.07,22.396 25.874,23.2 27.064,23.2 28.314,21.95 30.81,21.95 31.05,22.19 31.05,22.425 31.325,22.7 34,22.7 v1@34.3,22.4
  Bottom w0.15: R27.2@11.405,9.65 11.515,9.54 R31.1@12.44,9.54 12.59,9.54 v2(12.65,9.6) v2@12.63,9.6 ; R34.1@34.3,21.916 v1(34.3,22.375)
LMS_RX1_BB_I_P: IC1.Y6 R28.1 R31.2 R33.2 | length 44.7
  L4 w0.1: v1(32.93,14.013) 32.375,14.568 32.375,17.45 32.609,17.684 33.064,17.684 33.588,18.207 33.588,18.461 34.002,18.875 34.225,18.875 34.475,19.125 34.475,20.775 33.5,21.75 33.5,22.025 v1(33.85,22.375)
  L6 w0.1: v2(12.65,9.125) 13.508,9.125 13.783,9.4 14.133,9.4 14.983,10.25 16.4,10.25 16.675,10.525 17.291,10.525 18.816,12.05 19.416,12.05 20.19,12.824 20.19,15.999 21.275,17.084 21.275,18.3 22.175,19.2 23.283,19.2 24.225,20.142 24.225,20.742 24.225,20.76 24.675,21.21 24.675,21.717 25.27,22.312 ; 25.27,22.313 25.957,23 26.981,23 28.231,21.75 31.075,21.75 31.25,21.925 31.25,22.342 31.408,22.5 31.987,22.5 32.187,22.3 32.187,21.863 32.3,21.75 32.8,21.75 32.946,21.896 32.946,22.3 33.146,22.5 33.725,22.5 v1(33.85,22.375)
  Bottom w0.15: R33.2@11.405,9.1 11.515,9.21 R31.2@12.44,9.21 12.565,9.21 v2(12.65,9.125) 12.596,9.125 v2@12.556,9.085 ; R28.1@33.85,21.916 v1(33.85,22.375)
LMS_RX1_BB_Q_N: IC1.AA5 R36.2 R39.1 R42.1 | length 44
  Top w0.1: v1(33.263,14.346) 33.864,14.346 33.91,14.393 R42.1@33.91,14.425
  L6 w0.1: v2(17.275,6.875) 17.125,7.025 15.6,7.025 15.37,6.795 15.119,6.795 14.974,6.65 14.761,6.65 14.616,6.795 14.365,6.795 13.61,7.55 12.925,7.55 12.155,6.78 12.155,6.286 12.358,6.082 12.818,6.082 13.37,6.635 13.83,6.635 14.785,5.68 15.011,5.68 15.156,5.825 15.319,5.825 15.464,5.68 15.69,5.68 16.018,6.007 17.218,6.007 17.36,6.15 17.984,6.15 18.259,6.425 19.4,6.425 19.545,6.57 19.545,7.415 19.44,7.52 18.93,7.52 18.65,7.8 17.95,7.8 17.595,8.155 17.595,8.485 18.965,9.855 20.197,9.855 20.731,10.389 20.939,10.389 21.119,10.569 22.618,10.569 22.969,10.92 24.33,10.92 24.75,10.5 25.017,10.5 25.275,10.758 25.275,11.833 25.872,12.43 26.115,12.43 26.64,12.955 27.315,12.955 27.445,13.085 27.445,13.462 27.2,13.707 27.2,13.973 27.452,14.225 27.677,14.225 27.922,13.98 28.235,13.98 28.68,13.535 28.68,13.163 28.913,12.93 29.172,12.93 29.495,13.253 29.495,13.61 29.84,13.955 30.36,13.955 30.68,13.635 30.68,13.155 30.89,12.945 31.18,12.945 31.47,13.235 31.47,13.56 31.618,13.707 32.256,14.346 v1(33.263,14.346)
  Bottom w0.11: IC1.AA5@33.263,13.68 v1(33.263,14.346)
  Bottom w0.15: R36.2@16.015,6.865 16.125,6.975 R39.1@17.025,6.975 17.175,6.975 v2(17.275,6.875)
LMS_RX1_BB_Q_P: IC1.AB4 R37.1 R39.2 R41.2 | length 42.8
  Top w0.15: v1(33.596,13.347) R37.1@33.808,13.558
  L6 w0.1: v2(17.275,7.405) 17.266,7.405 17.091,7.23 15.515,7.23 15.285,7 14.45,7 13.695,7.755 13.265,7.755 13.26,7.75 12.842,7.75 12.297,7.205 12.29,7.205 11.95,6.865 11.95,6.385 11.95,6.208 12.275,5.882 12.907,5.882 13.455,6.43 13.745,6.43 14.7,5.475 15.775,5.475 16.102,5.802 17.302,5.802 17.445,5.945 18.062,5.945 18.342,6.225 19.49,6.225 19.75,6.485 19.75,7.5 19.525,7.725 19.008,7.725 18.733,8 18.04,8 17.8,8.24 17.8,8.4 19.05,9.65 20.292,9.65 20.826,10.184 21.034,10.184 21.214,10.364 22.695,10.364 23.047,10.715 24.235,10.715 24.65,10.3 25.1,10.3 25.475,10.675 25.475,11.75 25.95,12.225 26.2,12.225 26.725,12.75 27.4,12.75 27.65,13 27.65,13.5 27.85,13.7 28.225,13.7 28.475,13.45 28.475,13.085 28.835,12.725 29.25,12.725 29.7,13.175 29.7,13.525 29.925,13.75 30.275,13.75 30.475,13.55 30.475,13.07 30.805,12.74 31.265,12.74 31.675,13.15 31.675,13.475 31.888,13.688 33.255,13.688 v1(33.596,13.347)
  Bottom w0.15: R41.2@16.015,7.415 16.125,7.305 R39.2@17.025,7.305 17.175,7.305 v2(17.275,7.405)
LMS_RX2_BB_I_N: IC1.AC3 R43.2 R46.1 R49.1 | length 28.2
  L6 w0.1: v2(21.5,8.275) 21.35,8.125 20.767,8.125 20.5,7.858 20.5,7.1 21.175,6.425 21.625,6.425 23.55,8.35 27.742,8.35 28.2,7.892 28.2,6.675 28.65,6.225 29.85,6.225 32.85,9.225 32.85,10.242 33.708,11.1 34.75,11.1 35.1,11.45 35.1,12.302 34.396,13.006 34.394,13.006 34.386,13.014 v2(33.929,13.014)
  Bottom w0.1: v2(33.929,13.014) 33.937,13.006 34.396,13.006 34.527,12.875 35.91,12.875 R49.1@35.925,12.86
  Bottom w0.15: R43.2@19.84,7.785 20.23,8.175 R46.1@21,8.175 21.4,8.175 v2(21.5,8.275)
LMS_RX2_BB_I_P: IC1.AD2 R44.1 R46.2 R48.2 | length 28.4
  L6 w0.1: v2(21.5,7.745) 21.32,7.925 20.85,7.925 20.7,7.775 20.7,7.183 21.258,6.625 21.542,6.625 22.8,7.883 22.8,8.375 22.975,8.55 28.375,8.55 28.525,8.4 28.525,7.925 28.4,7.8 28.4,7.475 28.525,7.35 28.525,7.125 28.4,7 28.4,6.758 28.733,6.425 29.767,6.425 30.117,6.775 32.65,9.308 32.65,10.325 33.588,11.263 33.588,11.738 33.7,11.85 33.925,11.85 34.475,11.3 34.667,11.3 34.9,11.533 34.9,12.217 34.436,12.681 v2(34.262,12.681)
  Bottom w0.1: v2(34.262,12.681) 34.268,12.675 35.715,12.675 35.755,12.635 35.765,12.635 35.85,12.55 36.115,12.55 R44.1@36.425,12.86
  Bottom w0.15: R48.2@19.84,7.235 20.45,7.845 R46.2@21,7.845 21.4,7.845 v2(21.5,7.745)
LMS_RX2_BB_Q_N: IC1.AB6 R50.2 R55.1 R58.1 | length 26.3
  Top w0.15: v1(32.93,13.347) ccw(c32.93,13.389) 32.959,13.359 R58.1@33.158,13.558
  L6 w0.1: v2(21.175,9.66) 21.44,9.925 22.625,9.925 22.8,9.75 23.233,9.75 23.933,10.45 24.133,10.45 24.583,10 25.442,10 25.725,10.283 25.725,11.083 26.037,11.395 26.037,11.695 26.292,11.95 26.658,11.95 27.008,11.6 27.267,11.6 27.475,11.808 27.475,12.533 27.867,12.925 28.308,12.925 28.675,12.558 28.675,11.925 28.675,11.867 28.275,11.467 28.275,10.85 28.463,10.662 28.707,10.662 28.975,10.931 28.975,11.458 29.415,11.897 29.415,12.465 29.425,12.475 29.425,12.478 29.837,12.89 30.372,12.89 30.665,12.598 30.665,12.174 30.939,11.9 31.358,11.9 31.625,11.633 31.625,10.725 31.8,10.55 32.275,10.55 32.55,10.825 32.55,11.6 31.675,12.475 31.675,12.833 32.33,13.488 32.789,13.488 v1(32.93,13.347)
  Bottom w0.15: R50.2@19.865,9.525 19.975,9.635 R55.1@20.25,9.635 20.56,9.635 20.775,9.85 20.985,9.85 v2(21.175,9.66)
LMS_RX2_BB_Q_P: IC1.AC5 R51.1 R55.2 R57.2 | length 31.8
  L4 w0.1: v1(33.263,13.014) 34.011,13.014 34.2,12.825 35.525,12.825 36.325,13.625 36.325,14.675 36.225,14.775 35.75,14.775
  L6 w0.1: v2(21.6,9.45) 21.875,9.725 22.542,9.725 22.717,9.55 23.315,9.55 23.97,10.205 24.095,10.205 24.5,9.8 25.525,9.8 25.925,10.2 25.925,11 26.237,11.312 26.237,11.613 26.375,11.75 26.575,11.75 26.925,11.4 27.35,11.4 27.675,11.725 27.675,12.45 27.95,12.725 28.225,12.725 28.475,12.475 28.475,11.95 28.075,11.55 28.075,10.767 28.38,10.462 28.789,10.462 29.175,10.848 29.175,11.375 29.625,11.825 29.625,12.395 29.92,12.69 30.29,12.69 30.465,12.515 30.465,12.091 30.856,11.7 31.275,11.7 31.425,11.55 31.425,10.642 31.717,10.35 32.358,10.35 32.75,10.742 32.75,11.683 31.875,12.558 31.875,12.75 32.139,13.014 v1(33.263,13.014)
  Bottom w0.15: R57.2@19.865,10.075 19.975,9.965 R55.2@20.25,9.965 20.515,9.965 20.7,10.15 21.2,10.15 21.6,9.75 v2(21.6,9.45) ; v1@35.575,14.725 35.575,14.742 35.642,14.81 R51.1@35.675,14.81
  other v1: 35.575,14.75
LMS_RXEN: IC1.V34 R12.1 | length 1.5
  Bottom w0.15: R12.1@22.205,14.525 22.205,14.55 22.28,14.625 22.314,14.625 22.368,14.679 IC1.V34@23.605,14.679
LMS_RxPLL_CLK: C197.2 IC1.AM24 R150.2 | length 7
  Top w0.15: R150.2@26.425,16.445 26.42,16.44 C197.2@26.42,15.85 26.632,15.638 26.632,11.768 26.252,11.388 26.252,10.865 26.897,10.22 26.897,10.055 v1(26.935,10.017)
LMS_TSTAO: IC1.B22 R230.1 | length 1.8
  Bottom w0.15: IC1.B22@27.601,20.007 27.601,20.178 27.584,20.195 27.584,20.759 27.895,21.07 R230.1@28.45,21.07
LMS_TSTDO0: IC1.D22 R231.1 | length 2.9
  L6 w0.1: v1(27.601,19.341) 27.601,20.126 28.1,20.625 v2(28.875,20.625)
  Bottom w0.2: v2(28.875,20.625) 28.904,20.654 28.904,20.8 29.105,21.001 29.105,21.026 29.155,21.076 R231.1@29.18,21.076
LMS_TSTDO1: IC1.F22 R232.1 | length 5
  L6 w0.1: v1(27.601,18.675) 28.027,18.25 29.35,18.25 30,18.9 v2(30,20.575)
  Bottom w0.2: R232.1@29.95,21.076 29.95,20.625 v2(30,20.575)
LMS_TX1_BB_I_N: IC1.R5 R5.1 | length 27.3
  L6 w0.1: v2(14.353,8.183) 14.353,7.76 14.663,7.45 15.017,7.45 15.367,7.8 16.337,7.8 18.797,10.26 20.029,10.26 20.563,10.794 20.736,10.794 20.917,10.975 22.458,10.975 22.808,11.325 24.117,11.325 24.675,11.883 24.675,12.5 25.13,12.955 25.797,12.955 26.4,13.558 26.4,14.75 26.625,14.975 28.55,14.975 28.7,14.825 28.7,14.158 28.908,13.95 29.217,13.95 29.475,14.208 29.475,14.775 29.65,14.95 30.475,14.95 30.615,14.81 30.615,14.293 30.933,13.975 31.217,13.975 31.45,14.208 31.45,14.95 32.503,16.003 v2(32.938,16.003)
  Bottom w0.2: v2(32.938,16.003) IC1.R5@33.263,15.678
LMS_TX1_BB_I_P: IC1.T4 R1.1 | length 27.3
  L6 w0.1: v2(13.648,8.183) 14.58,7.25 15.1,7.25 15.45,7.6 16.42,7.6 18.88,10.06 20.112,10.06 20.646,10.594 20.819,10.594 21,10.775 22.541,10.775 22.891,11.125 24.2,11.125 24.25,11.175 24.875,11.8 24.875,12.417 25.213,12.755 25.88,12.755 26.6,13.475 26.6,14.371 27.004,14.775 28.142,14.775 28.5,14.417 28.5,14.075 28.825,13.75 29.3,13.75 29.675,14.125 29.675,14.475 29.95,14.75 30.25,14.75 30.415,14.585 30.415,14.21 30.85,13.775 31.3,13.775 31.65,14.125 31.65,14.55 32.778,15.678 33.186,15.678 33.496,15.369 v2@33.572,15.369
  other v2: 33.596,15.345
LMS_TX1_BB_Q_N: IC1.P2 R19.1 | length 27.3
  L6 w0.1: v2(15.272,8.183) 15.28,8.19 15.525,8.19 16.485,9.15 17.122,9.15 18.632,10.66 19.168,10.66 19.325,10.817 19.633,11.125 19.733,11.225 20.542,11.225 20.742,11.425 22.342,11.425 22.642,11.725 23.317,11.725 23.675,12.083 23.675,12.3 24.73,13.355 25.569,13.355 25.85,13.636 25.85,15.158 26.642,15.95 30.18,15.95 30.93,16.7 31.15,16.7 32.118,17.668 33.048,17.668 33.588,18.207 33.588,18.461 33.794,18.667 34.063,18.667 34.587,18.144 34.587,17.208 34.262,16.883 v2(34.262,16.011)